# Altium PCB test.PcbDoc
Units mil, origin at the board's own origin, x right, y up, seen from the top; angles counter-clockwise.
Board outline 5150 x 4000 mil, 4 copper layers (Top Layer, Ground, Power, Bottom Layer); 86 components, 62 nets, 253 pads, 52 vias.
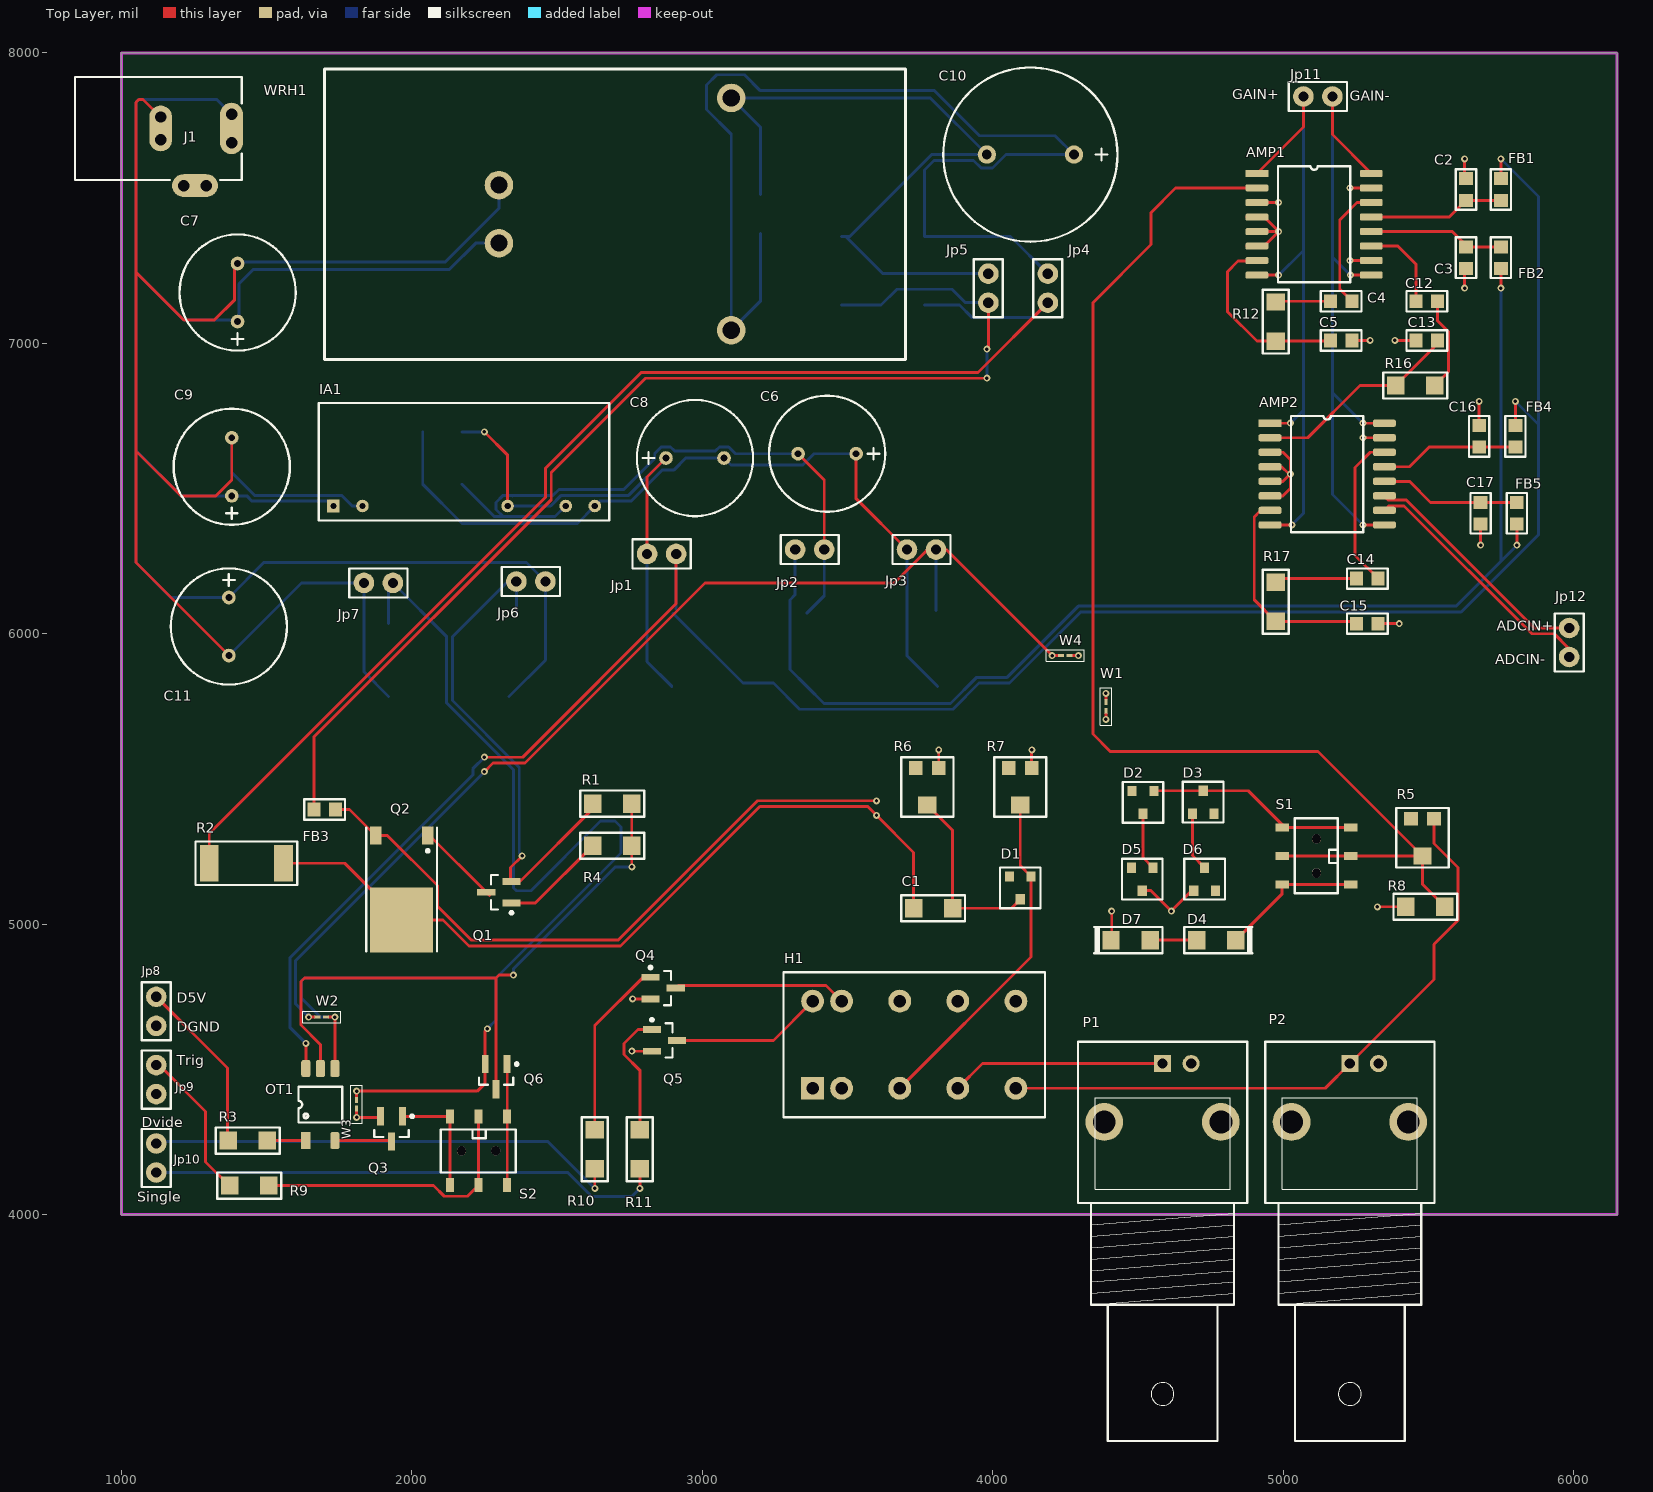
[diagram p0: Top Layer view]
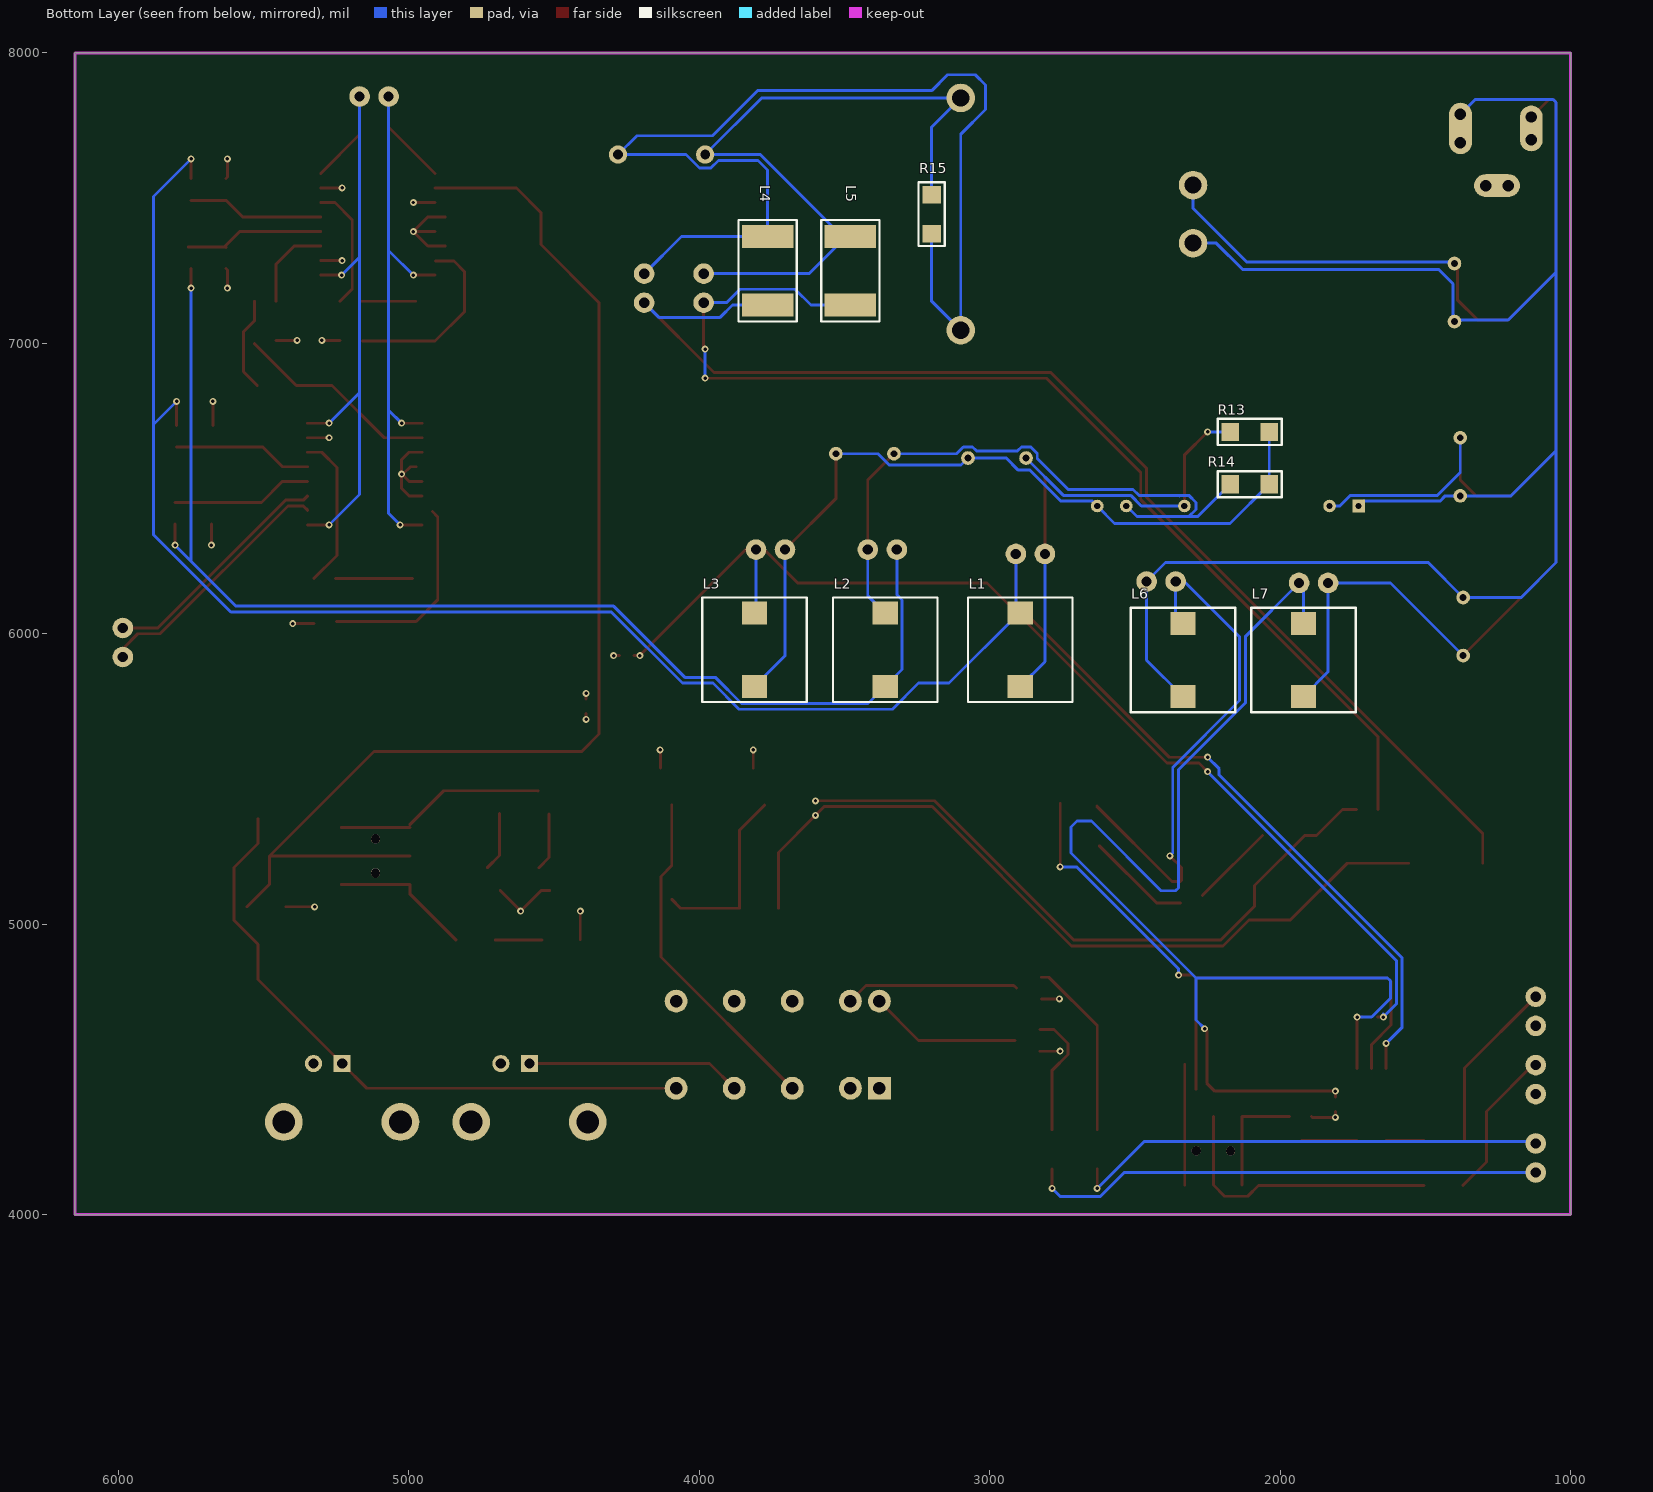
[diagram p1: Bottom Layer view, seen from below]
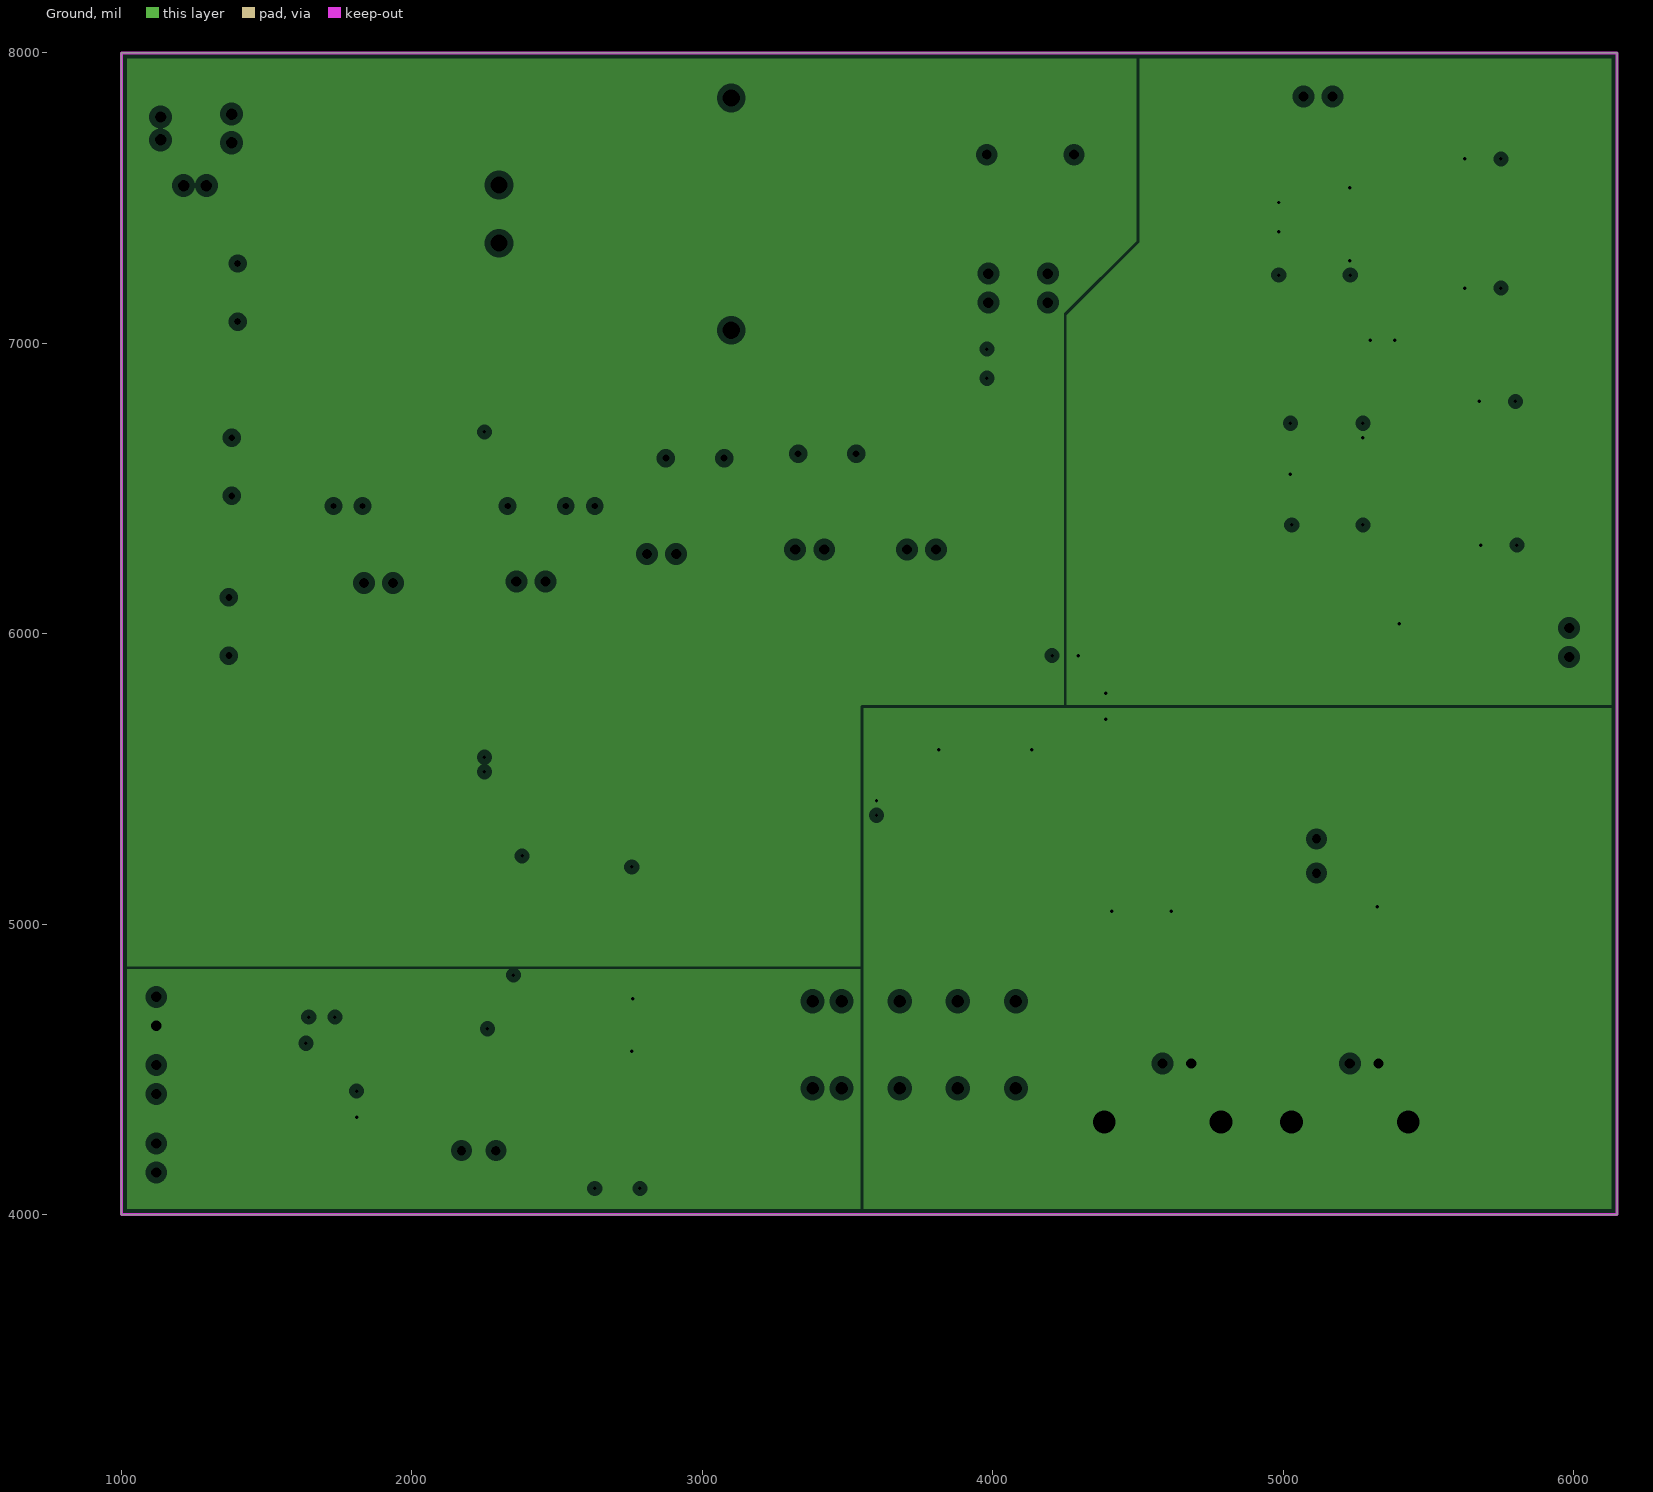
[diagram p2: Ground, clearances drawn from the general rule]
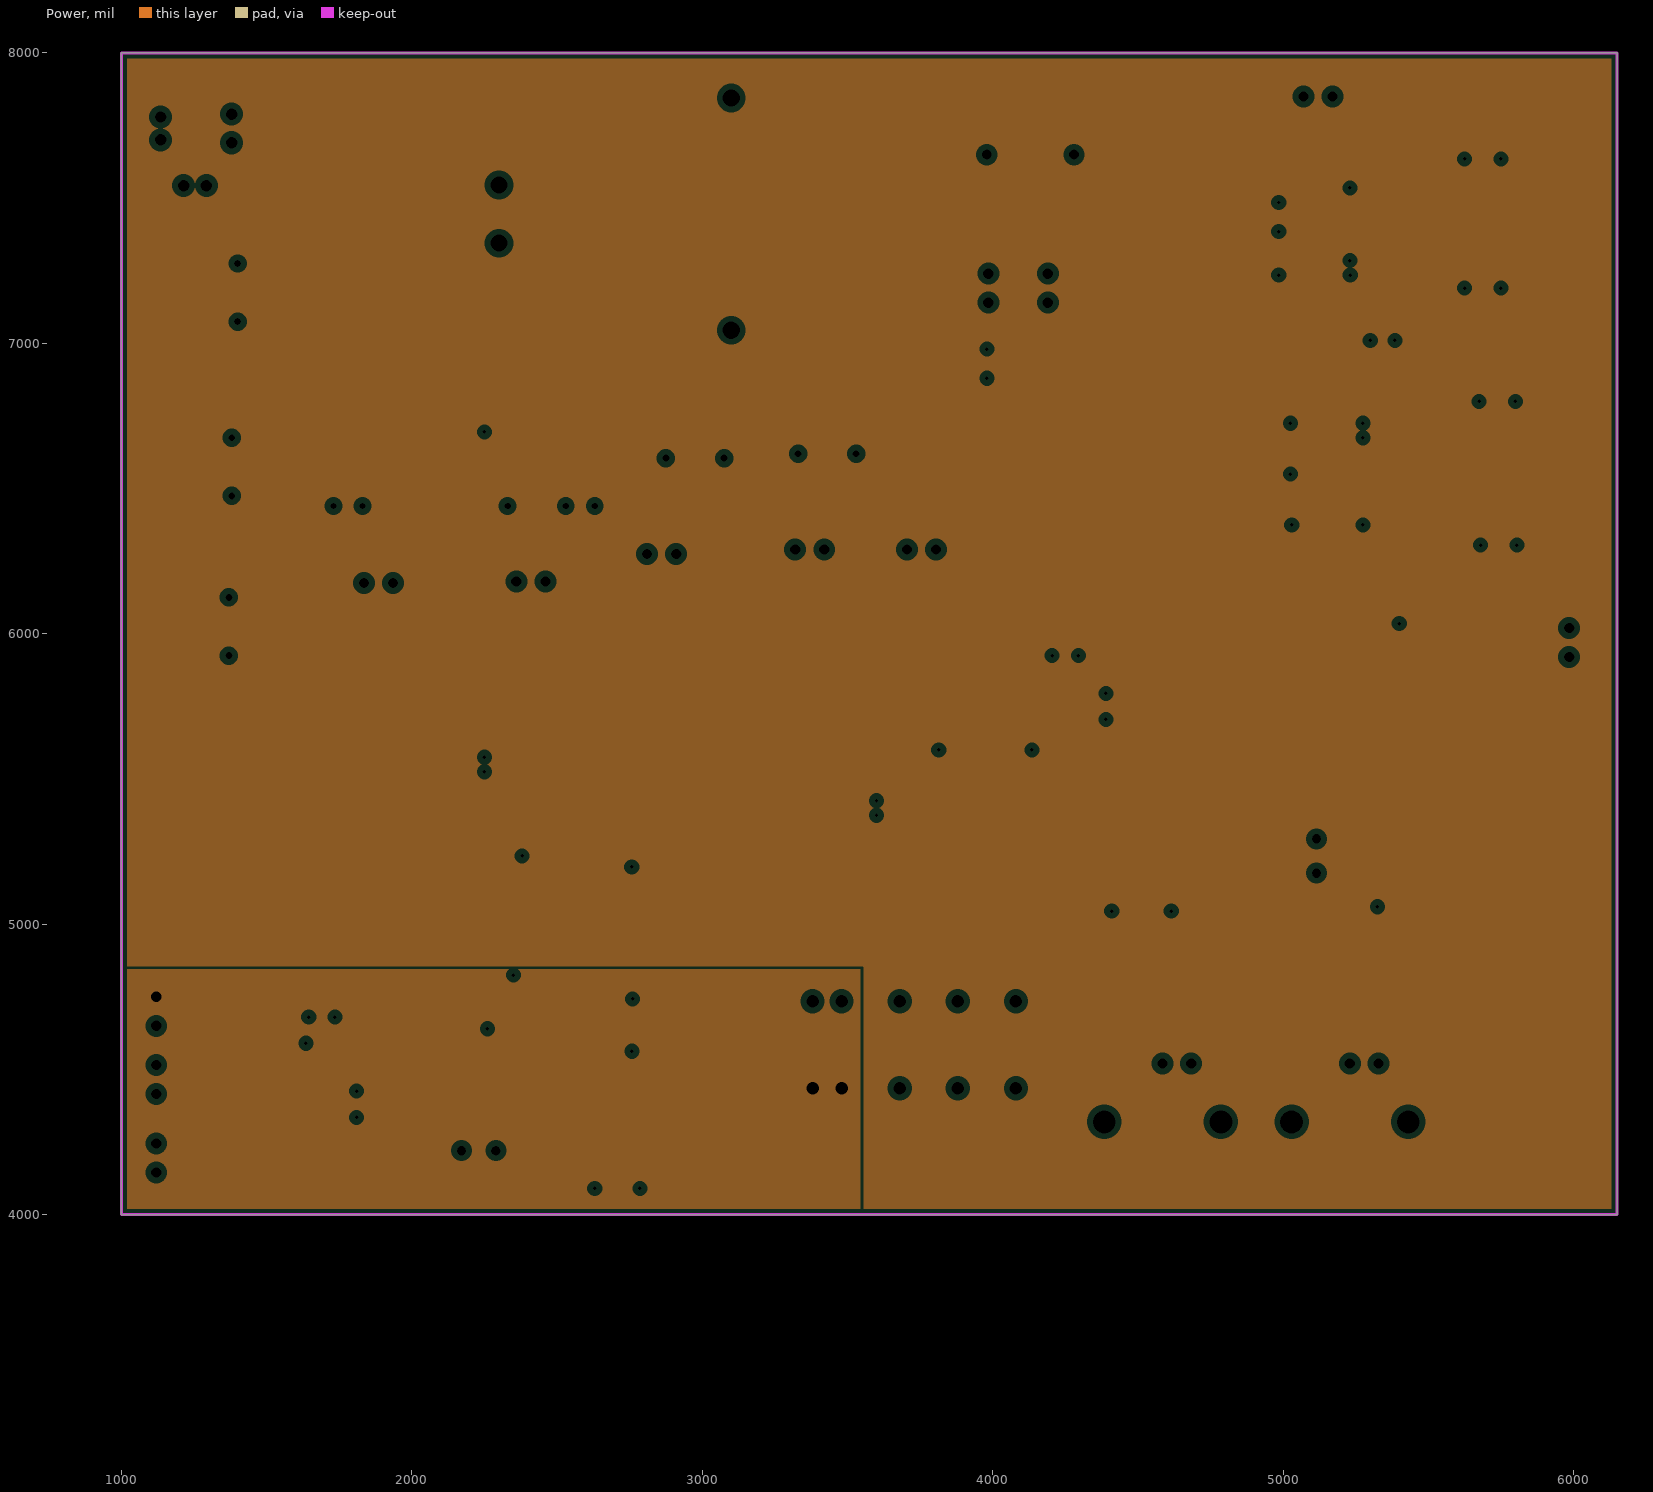
[diagram p3: Power, clearances drawn from the general rule]

## Layer stack, top to bottom
Top Layer: signal copper 1.4
Dielectric: core 12.6, FR-4, Dk 4.8
Ground: plane copper 1.4, net (Multiple Nets)
Dielectric: prepreg 12.6, FR-4, Dk 4.8
Power: plane copper 1.4, net D5V
Dielectric: core 12.6, FR-4, Dk 4.8
Bottom Layer: signal copper 1.4

## Board outline
1000,4000 6150,4000 6150,8000 1000,8000

## Design rules (kind name [scope] priority, off if disabled: settings)
Clearance [All] p1: gap=10
PlaneClearance [All] p1: clearance=20
PlaneConnect [All] p1: planeconnectstyle=Direct reliefexpansion=20 reliefentries=4 reliefconductorwidth=10 reliefairgap=10
PolygonConnect [All] p1: connectstyle=Relief reliefconductorwidth=10 reliefentries=4 polygonreliefangle="90 Angle"
RoutingCorners [All] p1: cornerstyle=Round minsetback=100 maxsetback=100
RoutingVias [All] p1: holewidth=12 width=24 viastyle="Through Hole" minholewidth=12 minwidth=24 maxholewidth=28 maxwidth=50
SilkToSilkClearance [All] p1: silktosilkclearance=0
SilkscreenOverComponentPads [All] p1: minsilkscreentomaskgap=0
SolderMaskExpansion [All] p1: expansion=4
Width [All] p1: maxlimit=10 minlimit=10 preferedwidth=10
23 further rules are at their usual default settings.

## Classes and differential pairs
component class amplify: AMP1 AMP2 C2 C3 C4 C5 C12 C13 C14 C15 C16 C17 FB1 FB2 FB4 FB5 Jp11 Jp12 R12 R16 R17 W4
component class Power: C6 C7 C8 C9 C10 C11 IA1 J1 Jp1 Jp2 Jp3 Jp4 Jp5 Jp6 Jp7 Jp8 L1 L2 L3 L4 L5 L6 L7 R13 R14 R15 WRH1
component class triger: C1 D1 D2 D3 D4 D5 D6 D7 FB3 H1 Jp9 Jp10 OT1 P1 P2 Q1 Q2 Q3 Q4 Q5 Q6 R1 R2 R3 R4 R5 R6 R7 R8 R9 R10 R11 S1 S2 W1 W2 W3

## Components (designator, comment, footprint, x,y, rotation, side; value= is the part's Value field where it differs from the comment)
AMP1 "AD602" SOP16 4910,7585 r0 top
AMP2 "AD602" SOP16 4955,6725 r0 top
C1 "C1206" 1206 3795,5055 r0 top
C2 "C0805" 0805 5630,7530 r90 top
C3 "C0805" 0805 5630,7295 r270 top
C4 "C0805" 0805 5200,7145 r0 top
C5 "C0805" 0805 5200,7010 r180 top
C6 "C-RB.2/.4" RB.2/.4 3330,6620 r0 top
C7 "C-RB.2/.4" RB.2/.4 1400,7275 r270 top
C8 "C-RB.2/.4" RB.2/.4 3075,6605 r180 top
C9 "C-RB.2/.4" RB.2/.4 1380,6675 r270 top
C10 "C-RB.3/.6" RB.3/.6 3980,7650 r0 top
C11 "C-RB.2/.4" RB.2/.4 1370,5925 r90 top
C12 "C0805" 0805 5495,7145 r180 top
C13 "C0805" 0805 5495,7010 r0 top
C14 "C0805" 0805 5290,6190 r0 top
C15 "C0805" 0805 5290,6035 r180 top
C16 "C0805" 0805 5675,6680 r90 top
C17 "C0805" 0805 5680,6415 r270 top
D1 "SMMBD914LT3G" SMMBD914LT3G 4095,5125 r270 top
D2 "SMMBD914LT3G" SMMBD914LT3G 4517.6,5419.37 r270 top
D3 "SMMBD914LT3G" SMMBD914LT3G 4725,5420 r90 top
D4 "ZMM2V4" DIODE1206 4770,4945 r0 top
D5 "SMMBD914LT3G" SMMBD914LT3G 4515,5155 r270 top
D6 "SMMBD914LT3G" SMMBD914LT3G 4730,5155 r90 top
D7 "ZMM2V4" DIODE1206 4475,4945 r180 top
FB1 "FB0805" 0805 5750,7530 r90 top
FB2 "FB0805" 0805 5750,7295 r90 top
FB3 "FB0805" 0805 1700,5395 r180 top
FB4 "FB0805" 0805 5800,6680 r90 top
FB5 "FB0805" 0805 5805,6415 r90 top
H1 "HDF2-L2" RELAY-HFD2-L2 3380,4435 r90 top
IA1 "IA1205S" IA1205S 1730,6440 r90 top
J1 "PWR2.5" KLD-0202 840,7740 r0 top
Jp1 "Jumper" JUMPER 2810,6275 r0 top
Jp2 "Jumper" JUMPER 3420,6290 r180 top
Jp3 "Jumper" JUMPER 3705,6290 r0 top
Jp4 "Jumper" JUMPER 4190,7240 r270 top
Jp5 "Jumper" JUMPER 3985,7240 r270 top
Jp6 "Jumper" JUMPER 2460,6180 r180 top
Jp7 "Jumper" JUMPER 1835,6175 r0 top
Jp8 "Jumper" JUMPER 1120,4650 r90 top
Jp9 "Jumper" JUMPER 1120,4415 r90 top
Jp10 "Jumper" JUMPER 1120,4145 r90 top
Jp11 "Jumper" JUMPER 5170,7850 r180 top
Jp12 "Jumper" JUMPER 5985,5920 r90 top
L1 "L-CHIP774" INDUCTOR070704 2895,5945 r90 bottom
L2 "L-CHIP774" INDUCTOR070704 3360,5945 r270 bottom
L3 "L-CHIP774" INDUCTOR070704 3810,5945 r90 bottom
L4 "NL565050T-103J" NL565050T 3765,7250 r270 bottom
L5 "NL565050T-103J" NL565050T 3480,7250 r270 bottom
L6 "L-CHIP774" INDUCTOR070704 2335,5910 r90 bottom
L7 "L-CHIP774" INDUCTOR070704 1920,5910 r90 bottom
OT1 "PC410L" SOP5 1635,4255 r90 top
P1 "BNC" "BNC_RA CON" 4585,4520 r90 top
P2 "BNC" "BNC_RA CON" 5230,4520 r90 top
Q1 "MMBT3906" SOT23_M 2300,5110 r180 top
Q2 "MTD6N10E" 369A-13 1965,5160 r180 top
Q3 "MMBT3904" SOT23_M 1930,4295 r270 top
Q4 "MMBT3904" SOT23_M 2865,4780 r0 top
Q5 "MMBT3904" SOT23_M 2870,4600 r0 top
Q6 "MMBT3904" SOT23_M 2290,4475 r270 top
R1 "R1206" 1206 2690,5415 r180 top
R2 "R2512" 2512 1430,5210 r180 top
R3 "R1206" 1206 1435,4255 r0 top
R4 "R1206" 1206 2690,5270 r180 top
R5 "ResAdj" "Adjust Resistor" 5480,5300 r180 top
R6 "ResAdj" "Adjust Resistor" 3775,5475 r180 top
R7 "ResAdj" "Adjust Resistor" 4095,5475 r180 top
R8 "R1206" 1206 5490,5060 r0 top
R9 "R1206" 1206 1440,4100 r0 top
R10 "R1206" 1206 2630,4225 r90 top
R11 "R1206" 1206 2785,4225 r90 top
R12 "R1206" 1206 4975,7075 r90 top
R13 "R1206" 1206 2105,6695 r0 bottom
R14 "R1206" 1206 2105,6515 r0 bottom
R15 "R1206" 1206 3200,7445 r270 bottom
R16 "R1206" 1206 5455,6855 r0 top
R17 "R1206" 1206 4975,6110 r90 top
S1 "Switch" MSS-22C02#1 5115,5235 r180 top
S2 "Switch" MSS-22C02#2 2230,4220 r270 top
W1 "Wire" WIRE#1 4390,5750 r90 top
W2 "Wire" WIRE#1 1690,4680 r180 top
W3 "Wire" WIRE#2 1810,4380 r90 top
W4 "Wire" WIRE#1 4250,5925 r180 top
WRH1 "WRH12400S" WRH12400S 2700,7445 r0 top

## Footprints (in the part's own frame and the unit in brackets; to place one, negate y for a bottom-side part, rotate by r counter-clockwise, add the part's x,y. Pads: shape width x height; smd on the part's side, far side on the other; paste and mask are expansions set on the pad)
369A-13 [mm] "D-PAK/TO-252-AA; 3 Leads (1 Cropped); Body 10.3 (inc. leads) x 6.7 mm (LxW max)"
  rect 1x1.6 smd: 1(-2.285,-3.7) 3(2.285,-3.7)
  rect 5.5x5.7 smd: 4(0,3.7)
  silkscreen extent -3.08,-4.4 3.08,6.45
0805 [mm]
  rect 1.14x1.2 smd: 1(-0.95,0) 2(0.95,0)
  silkscreen extent -1.78,-0.89 1.78,0.89
1206 [mm]
  rect 1.52x1.6 smd: 1(-1.71,0) 2(1.71,0)
  silkscreen extent -2.79,-1.14 2.79,1.14
2512 [mm]
  rect 1.65x3.2 smd: 1(-3.24,0) 2(3.24,0)
  silkscreen extent -4.44,-1.91 4.44,1.91
"Adjust Resistor" [mm] "3 * 3"
  rect 1.2x1.2 smd: a(-1,-1.6) c(1,-1.6)
  rect 1.6x1.5 smd: b(0,1.65)
  silkscreen extent -2.29,-2.54 2.29,2.67
"BNC_RA CON" [mm] "Connector; BNC Elbow"
  rect 1.5x1.5 hole 0.9: 1(0,0)
  round 3.3 hole 2: 2(-5.1,-5.1) 2(-5.1,5.1)
  round 1.5 hole 0.9: 2(0,-2.5)
  silkscreen extent -33,-7.4 1.9,7.4
DIODE1206 [mm]
  rect 1.52x1.6 smd: 1(-1.71,0) 2(1.71,0)
  silkscreen extent -2.79,-1.14 3.17,1.14
IA1205S [mm]
  rect 1.1x1.1 hole 0.55: 1(0,0)
  round 1.1 hole 0.55: 2(0,-2.54) 7(0,-15.24) 9(0,-20.32) 10(0,-22.86)
  silkscreen extent -1.27,-24.13 9.02,1.27
INDUCTOR070704 [mm]
  rect 2x2.2 smd: 1(-3.2,0) 2(3.2,0)
  silkscreen extent -4.57,-4.57 4.57,4.57
JUMPER [mm]
  round 1.8 hole 0.9: 1(0,0) 2(2.54,0)
  silkscreen extent -1.27,-1.27 3.81,1.27
KLD-0202 [mm] "DC Power Jack, 2.5mm, KLD Series, PCB Mount"
  oval 2x4.5 all layers, no hole: 1(13.7,0)
  round 1.5 hole 1: 1A(13.7,-1.25) 1B(13.7,1.25) 2A(7.5,-1) 2B(7.5,1) 3A(9.5,-5) 3B(11.5,-5)
  oval 2x4 all layers, no hole: 2(7.5,0)
  oval 4x2 all layers, no hole: 3(10.5,-5)
  silkscreen extent 0,-4.5 14.6,4.5
MSS-22C02#1 [mm]
  rect 1.2x0.7 smd: a(-3,0) a(3,0) b(-3,2.5) b(3,2.5) c(-3,-2.5) c(3,-2.5)
  round 0.82 hole 0.82: ""(0,1.5) ""(0,-1.5)
  Top Layer lines w0.254: 3,2.5 0,2.5 -3,2.5 ; 3,0 -3,0 ; 3,-2.5 -3,-2.5
  silkscreen extent -1.86,-3.3 1.91,3.26
MSS-22C02#2 [mm]
  rect 1.2x0.7 smd: a(-3,0) a(3,0) b(-3,2.5) b(3,2.5) c(-3,-2.5) c(3,-2.5)
  round 0.82 hole 0.82: ""(0,1.5) ""(0,-1.5)
  Top Layer lines w0.254: 3,-2.5 -3,-2.5 ; 3,0 -3,0 ; 3,2.5 -3,2.5
  silkscreen extent -1.86,-3.3 1.91,3.26
NL565050T [mm]
  rect 2x4.5 smd: 1(-3,0) 2(3,0)
  silkscreen extent -4.45,-2.54 4.45,2.54
RB.2/.4 [mm]
  round 1.2 hole 0.6: 1(0,0) 2(5.08,0)
  silkscreen extent -2.54,-5.08 7.62,5.08
RB.3/.6 [mm]
  round 1.6 hole 0.85: 1(0,0) 2(7.62,0)
  silkscreen extent -3.81,-7.62 11.43,7.62
RELAY-HFD2-L2 [mm]
  rect 2x2 hole 1.1: 1(0,0)
  round 2 hole 1.1: 2(0,-2.54) 4(0,-7.62) 6(0,-12.7) 8(0,-17.78) 9(7.62,-17.78) 11(7.62,-12.7) 13(7.62,-7.62) 15(7.62,-2.54) 16(7.62,0)
  silkscreen extent -2.54,-20.32 10.16,2.54
SMMBD914LT3G [mm]
  rect 0.9x0.8 smd: 1(-1,0.95) 2(-1,-0.95) 3(1,0)
  silkscreen extent -1.78,-1.78 1.78,1.78
SOP5 [mm]
  rect 1.5x0.8 smd: 1(0,0)
  rrect50% 1.5x0.8 smd: 3(0,-2.54) 4(6.3,-2.54) 5(6.3,-1.27) 6(6.3,0)
  silkscreen extent 1.59,-3.17 4.72,0.64
SOP16 [mm]
  rect 2x0.63 smd: 1(0,0)
  rrect50% 2x0.63 smd: 2(0,-1.27) 3(0,-2.54) 4(0,-3.81) 5(0,-5.08) 6(0,-6.35) 7(0,-7.62) 8(0,-8.89) 9(10,-8.89) 10(10,-7.62) 11(10,-6.35) 12(10,-5.08) 13(10,-3.81) 14(10,-2.54) 15(10,-1.27) 16(10,0)
  silkscreen extent 1.83,-9.53 8.16,0.64
SOT23_M [mm] "SOT23, 3-Leads, Body 2.9x1.3mm, Pitch 0.95mm, Lead Span 2.3mm, IPC Low Density"
  rect 1.6x0.6 smd: 1(-1.1,0.95) 2(-1.1,-0.95) 3(1.1,0)
  silkscreen extent -1.23,-1.5 0.7,1.92, body extent -0.7,-1.5 0.7,1.5, height 1.1
WIRE#1 [mil]
  rect 20x10 smd mask+5: 1(-15,0) 2(15,0)
  Top Layer lines w10: -45,0 -25,0 ; 25,0 45,0
  silkscreen extent -65,-20 65,20
WIRE#2 [mil]
  rect 20x10 smd mask+5: 1(-15,0) 2(15,0)
  Top Layer lines w10: -45,0 -41.69,0 -25,0 ; 25,0 45,0
  silkscreen extent -65,-20 65,20
WRH12400S [mm]
  round 2.5 hole 1.5: 1(-10.16,-2.54) 2(-10.16,2.54) 3(10.16,-10.16) 5(10.16,10.16)
  silkscreen extent -25.4,-12.7 25.4,12.7

## Part data
C1: "Capacitor, 1206"
C2 C3 C4 C5 C12 C13 C14 C15 C16 C17: "Capacitor, 0805"
C6 C7 C8 C9 C10 C11: "Capacitor"
D1 D2 D3 D5 D6: "Switching Diode"
D4 D7: "Voltage Stabilizing Diode, 2.4V"
FB1 FB2 FB3 FB4 FB5: "Chip Bead, 0805"
H1: library part Relay-HDF2-L2, "Relay, HDF2-XX-XX-L2-XX"
IA1: "IA1205S,12V to +5V,-5V"
J1: "Low Voltage Power Supply Connector"
L1 L2 L3 L6 L7: library part Inductor070704, "Chip Inductor, 7*7*4"
L4 L5: "NL565050T, 10mH, 150 ohm"
P1 P2: "BNC Elbow Connector"
Q1: "PNP Switching Transistor"
Q2: "TMOS E-FET Power Field Effect Transistor DPAK for Surface Mount"
Q3 Q4 Q5 Q6: "NPN Switching Transistor"
R1 R3 R4 R8 R9 R10 R11 R12 R13 R14 R15 R16 R17: "Resistor, 1206, 1/4W"
R2: "Resistor, 2512, 1W"
R5 R6 R7: "Adjustable Resistor"
S1 S2: library part MSS-22C02, "Duble Switch"
WRH1: "WRH12400S,12V-400V"

## Via types
v1: diameter 24, hole 12, Top Layer to Bottom Layer, 52 vias

## Nets (pads, with @x,y where several pads share a name; then routed paths per layer and width w, separated by ;. In a path a pad name is that pad's centre, name@x,y a point inside that pad or via, vN(x,y) a via of type N, cw(c..) or ccw(c..) an arc to the next point about the centre after c; other vN are vias at no path point)
12V: Jp6.2 L6.2 Q1.2 R1.2 | length 1768.3
  Top Layer w10: Q1.2@2340,5150.71 2340,5195 v1(2380,5235) ; Q1.2 2372.4,5147.4 R1.2@2631.34,5406.34
  Bottom Layer w10: L6.2@2360,6060.98 Jp6.2 2330,6180 2140,5990 2140,5770 2370,5540 2370,5245 v1(2380,5235)
12VREF: Jp7.2 L7.2 OT1.4 Q6.2 W2.1 W3.2 | length 4451.6
  Top Layer w10: OT1.4 v1(1735,4680) ; v1(1810,4425) 2225,4425 2252.6,4452.6 Q6.2 v1@2252.6,4632.6 ; Jp7.2 Jp7.2@1965,6175
  Bottom Layer w10: v1(1735,4680) 1685,4680 1620,4745 1620,4805 1630,4815 2290,4815 ; L7.2 1920,6145 1935,6160 Jp7.2 2120,5990 2120,5761.72 2350,5531.72 2350,5125 2360,5115 2410,5115 2650,5355 2700,5355 2720,5335 2720,5245 2290,4815 ; v1(2260,4640) 2290,4670 2290,4815
400V: Jp4.2 L4.2 R2.2 | length 4269
  Top Layer w10: R2.2 1302.44,5312.44 2460,6470 2460,6570 2790,6900 3950,6900 Jp4.2
  Bottom Layer w10: L4.2 3885.88,7131.89 3928.2,7089.57 4139.57,7089.57 Jp4.2
400VREF: FB3.2 Jp5.2 L5.2 | length 3924.9
  Top Layer w10: FB3.2 1662.6,5644.31 2480,6461.72 2480,6555 2805,6880 v1(3980,6880) ; v1@3985,6985 Jp5.2
  Bottom Layer w10: L5.2 3615.83,7131.89 3670.2,7186.26 3859.8,7186.26 3906.06,7140 Jp5.2 ; v1(3980,6880) v1@3980,6970
  other v1: 3980,6980
+5V: FB1.2 FB4.2 Jp1.2 L1.2 OT1.6 | length 7602.2
  Top Layer w10: OT1.6 v1(1635,4590) ; v1(2250,5575) 2381.72,5575 2910,6103.28 Jp1.2 Jp1.2@2925,6275 ; FB1.2 v1(5750,7635) ; FB4.2 v1(5800,6800)
  Bottom Layer w10: v1(1635,4590) 1580,4645 1580,4883.28 2210,5513.28 2210,5535 v1(2250,5575) ; L1.2@2900,6070 3140,5830 3245.13,5830 3335.13,5740 3863.16,5740 3953.16,5830 4058.28,5830 4303.28,6075 5613.18,6075 5879.14,6340.96 5879.14,6720.86 ; L1.2@2910,6085 Jp1.2 ; v1(5750,7635) 5879.14,7505.86 5879.14,6720.86 ; v1(5800,6800) 5879.14,6720.86
+-5VREF: Jp3.2 L3.2 W2.2 W4.2 | length 3777.7
  Top Layer w10: v1(2250,5525) 2280,5555 2390,5555 3010,6175 3661.32,6175 3776.32,6290 Jp3.2 3840,6290 v1(4205,5925)
  Bottom Layer w10: v1@1645,4691.72 v1(1645,4680) 1600,4725 1600,4875 v1(2250,5525) ; L3.2@3805,6080 Jp3.2
-5V: FB2.1 FB5.1 Jp2.2 L2.2 | length 5272.3
  Top Layer w10: v1(5750,7190) FB2.1 ; v1(5805,6305) FB5.1
  Bottom Layer w10: Jp2.2 3320,6134.87 3301.69,6116.57 3301.69,5877.32 L2.2 3419.02,5760 3854.87,5760 3944.87,5850 4050,5850 4295,6095 5595,6095 ; 4820,6095 5595,6095 ; v1(5750,7190) 5750,6250 5595,6095 ; v1(5805,6305) 5595,6095
ADCIN+: AMP2.11 Jp12.2 | length 824.8
  Top Layer w10: AMP2.11 5363.7,6460 5425,6460 5865,6020 Jp12.2
ADCIN-: AMP2.10 Jp12.1 | length 874.7
  Top Layer w10: AMP2.10 5363.7,6440 5416.72,6440 5856.72,6000 5933.68,6000 5985,5948.68 Jp12.1
AGND: D5.3 D6.1 D7.2 FB3.1 P1.2 P2.2 Q2.3 R6.a R7.a R8.1 W1.1 | length 2837.9
  Top Layer w10: FB3.1 1785.71,5395 Q2.3 1915.35,5305.67 2088.27,5132.75 2088.27,5061.73 2205,4945 2710,4945 3190,5425 v1(3600,5425) ; R6.a v1(3814.37,5600) ; R7.a v1@4134.37,5600 ; D7.2@4410,4947.32 v1(4410,5045) ; D5.3 4544.37,5115.63 v1(4615,5045) D6.1@4685.63,5115.63 ; v1(5325,5060) R8.1
  other v1: 4135,5600 4390,5705
D5V: H1.1 H1.2 Jp8.2 R3.1 | length 596.5
  Top Layer w10: Jp8.2 1365,4505 R3.1@1365,4255
DGND: Jp8.1 Q3.2 Q4.2 Q5.2 W3.1 | length 215.8
  Top Layer w10: v1(1810,4335) 1889.29,4335 Q3.2 ; v1(2757.6,4562.6) Q5.2 ; v1@2760,4740 2762.6,4742.6 Q4.2
  other v1: 2760,4742.6
DIVIDE: Jp10.2 R10.1 | length 1647
  Top Layer w10: v1(2630,4090) R10.1
  Bottom Layer w10: Jp10.2 1126.14,4251.14 2468.86,4251.14 v1(2630,4090)
GAINCTRL: AMP1.1 AMP1.8 AMP2.1 AMP2.8 Jp11.2 | length 2219.6
  Top Layer w10: AMP1.8 v1(4985,7235) ; AMP1.1 5070,7745 Jp11.2 ; AMP2.8 v1(5030,6375) ; AMP2.1 v1(5025,6725)
  Bottom Layer w10: v1(4985,7235) 5065,7315 ; v1(5025,6725) 5070,6770 ; v1(5030,6375) 5070,6415 5070,6770 ; Jp11.2 5070,6770
NetAMP1_7: AMP1.7 C5.2 R12.1 | length 646.6
  Top Layer w10: AMP1.7@4908.18,7283.18 4845,7283.18 4808,7246.18 4808,7109.6 4909.92,7007.68 R12.1 C5.2@5160.27,7007.68
NetAMP1_9: AMP1.9 AMP1.16 AMP2.9 AMP2.16 Jp11.1 | length 2290.4
  Top Layer w10: Jp11.1 5170,7718.7 AMP1.16 ; v1@5235,7235 AMP1.9 ; v1(5275,6375) AMP2.9 ; v1(5275,6725) AMP2.16
  Bottom Layer w10: Jp11.1 5170,7296.46 ; v1(5231.46,7235) 5170,7296.46 ; v1(5275,6375) 5170,6480 5170,6830 ; v1(5275,6725) 5170,6830 ; 5170,6830 5170,7296.46
NetAMP1_11: AMP1.11 C12.2 | length 307.2
  Top Layer w10: AMP1.11 5395,7335 5457.6,7272.4 C12.2
NetAMP1_12: AMP1.12 C3.1 FB2.2 | length 480.5
  Top Layer w10: AMP1.12 5582.4,7385 5635,7332.4 FB2.2 FB2.2@5760,7332.4 ; C3.1@5630,7330 C3.1
NetAMP1_13: AMP1.13 C2.1 FB1.1 | length 470.2
  Top Layer w10: AMP1.13 5572.4,7435 C2.1 FB1.1
NetAMP1_14: AMP1.14 C4.2 | length 431.1
  Top Layer w10: C4.2 5195,7187.4 5195,7425 5255,7485 AMP1.14
NetAMP2_2: AMP2.2 C13.2 R16.1 | length 711.9
  Top Layer w10: AMP2.2 5085,6675 5265,6855 R16.1 C13.2@5532.4,6999.72
NetAMP2_7: AMP2.7 C15.2 R17.1 | length 691.6
  Top Layer w10: AMP2.7@4919.11,6420.89 4900.63,6402.4 4900.63,6117.05 R17.1 C15.2@5249.92,6042.68
NetAMP2_12: AMP2.12 C17.1 FB5.2 | length 486.4
  Top Layer w10: AMP2.12 5435,6525 5507.6,6452.4 C17.1 FB5.2
NetAMP2_13: AMP2.13 C16.1 FB4.1 | length 491.7
  Top Layer w10: AMP2.13 5435,6575 5502.6,6642.6 5600,6642.6 ; 5587.6,6642.6 C16.1 FB4.1
NetAMP2_14: AMP2.14 C14.2 | length 538.1
  Top Layer w10: C14.2 5248,6269.4 5248,6573 5300,6625 AMP2.14
NetC1_1: C1.1 Q2.4 R2.1 | length 2744.6
  Top Layer w10: R2.1 1769.33,5210 Q2.4 2107.39,5014.33 2196.72,4925 2718.28,4925 3198.28,5405 3570,5405 v1(3600,5375) 3727.68,5247.32 C1.1
NetC1_2: C1.2 D1.3 R6.b | length 636.6
  Top Layer w10: R6.b 3862.32,5322.72 C1.2 4064.37,5055 D1.3
NetC4_1: C4.1 R12.2 | length 184.9
  Top Layer w10: R12.2@4977.68,7145 C4.1
NetC6_1: C6.1 IA1.9 Jp2.1 L2.1 R14.2 | length 2254.2
  Top Layer w10: C6.1 3420,6530 Jp2.1
  Bottom Layer w10: R14.2 2283.98,6403.35 2314.82,6403.35 ; 2346.84,6475 2345.18,6476.65 ; IA1.9@2518.22,6440 IA1.9 2493.35,6403.35 2314.82,6403.35 ; C6.1 3114.62,6620 3091,6643.62 3059,6643.62 3045.38,6630 2904.62,6630 2891,6643.62 2859,6643.62 2836.38,6621 2836.38,6603.03 2730,6496.65 2506.53,6496.65 2486.53,6476.65 2345.18,6476.65 ; L2.1 3420,6130.98 Jp2.1 ; 2314.82,6403.35 2290,6428.16 2290,6451.84 2314.82,6476.65 2345.18,6476.65
NetC6_2: C6.2 C8.1 IA1.10 Jp3.1 L3.1 R13.1 R14.1 | length 2764.2
  Top Layer w10: C6.2 3530,6465 Jp3.1
  Bottom Layer w10: R13.1 R14.1 2172.68,6380 2570,6380 IA1.10 2646.65,6456.65 2754.94,6456.65 2861.64,6563.36 2901.64,6563.36 2943.28,6605 C8.1 3098.62,6581.38 3346,6581.38 3384.62,6620 C6.2 ; Jp3.1 3705,5924.02 L3.1
NetC7_1: C7.1 C9.1 C11.1 IA1.2 J1.2 J1.2A J1.2B Jp7.1 L7.1 WRH1.2 | length 5955
  Top Layer w10: 1057.5,6622.5 1205,6475 1325.38,6475 1380,6529.62 C9.1 ; J1.2B 1074.65,7840 1060,7840 1050,7830 1050,7245 ; C11.1 1050,6245 1050,7245 ; C7.1@1390,7280 1390,7150 1320,7080 1215,7080 1050,7245
  Bottom Layer w10: C11.1 1620,6175 Jp7.1 1835,5869.02 L7.1 ; C9.1@1375,6675 C9.1 1380,6555 1458.35,6476.65 1757.87,6476.65 1794.52,6440 IA1.2 ; C7.1@1390,7280 2115,7280 2300,7465 WRH1.2
NetC7_2: C7.2 C9.2 C11.2 IA1.1 J1.1 J1.1A J1.1B Jp6.1 L6.1 WRH1.1 | length 6186.3
  Top Layer w10: Jp6.1 Jp6.1@2485,6180
  Bottom Layer w10: J1.1B 1328.58,7840 1060,7840 1050,7830 1050,7245 ; C7.2@1390,7090 C7.2@1390,7080 ; IA1.1@1713.35,6456.65 1450.06,6456.65 1431.72,6475 C9.2 1205,6475 1050,6630 ; WRH1.1 2220,7345 2130,7255 1455,7255 1405,7205 1405,7095 C7.2@1390,7080 ; L6.1 2460,5909.02 Jp6.1 2395,6245 1490,6245 C11.2 1170,6125 1050,6245 1050,6630 ; 1050,6630 1050,7245 ; 1050,7245 1215,7080 C7.2@1390,7080
NetC8_2: C8.2 IA1.7 Jp1.1 L1.1 R13.2 | length 1827.3
  Top Layer w10: v1(2250,6695) 2330,6615 IA1.7 ; Jp1.1 2810,6540 C8.2
  Bottom Layer w10: R13.2 v1(2250,6695) ; IA1.7 2478.16,6440 2514.82,6476.65 2746.65,6476.65 C8.2 ; Jp1.1 2810,5904.02 L1.1
NetC10_1: C10.1 Jp5.1 L5.1 R15.1 WRH1.5 | length 2493.6
  Bottom Layer w10: R15.1 3200,7745 WRH1.5 3785,7845 3975,7655 C10.1@3975,7650 ; L5.1 L5.1@3494.05,7368.11 ; C10.1 C10.1@3975,7650 ; Jp5.1 3622.16,7240 L5.1@3494.05,7368.11 ; L5.1@3494.05,7368.11 3508.11,7368.11 3790,7650 C10.1@3975,7650
NetC10_2: C10.2 Jp4.1 L4.1 R15.2 WRH1.3 | length 3913.4
  Bottom Layer w10: R15.2 3200,7145 WRH1.3 3100,7720 3015,7805 3015,7890 3050,7925 3145,7925 3200,7870 3800,7870 3955,7715 4215,7715 C10.2 4045.76,7650 3999.26,7603.5 3960.74,7603.5 3934.24,7630 3798.28,7630 3765,7596.72 L4.1 4061.89,7368.11 Jp4.1
NetC12_1: C12.1 R16.2 | length 325.2
  Top Layer w10: R16.2 5569.84,6902.52 5569.84,7039.84 5532.4,7077.28 C12.1
NetC14_1: C14.1 R17.2 | length 264.9
  Top Layer w10: R17.2@4987.68,6190 C14.1
NetD1_1: D1.1 H1.4 R7.b | length 1177.9
  Top Layer w10: H1.4 4132.4,4887.4 D1.1 4095,5201.77 R7.b
NetD2_1: D2.1 D3.3 S1.c | length 490.6
  Top Layer w10: D2.1 4555.63,5459.37 D3.3 4880,5459.37 S1.c@4996.89,5342.48
NetD2_3: D2.3 D5.1 | length 200
  Top Layer w10: D2.3 4517.6,5229.17 D5.1
NetD3_1: D3.1 D6.3 | length 203.8
  Top Layer w10: D3.1 4687.6,5236.77 D6.3
NetD4_1: D4.1 D7.1 | length 160.4
  Top Layer w10: D7.1 D4.1
NetD4_2: D4.2 S1.b | length 257.7
  Top Layer w10: D4.2 4996.89,5104.57 S1.b@4996.89,5136.57
NetH1_6: H1.6 P1.1 | length 740.2
  Top Layer w10: H1.6 3965,4520 P1.1
NetH1_8: H1.8 P2.1 R5.a | length 2216.7
  Top Layer w10: H1.8 5145,4435 P2.1 5519.37,4809.37 5519.37,4930.63 5602.24,5013.5 5602.24,5195.03 5519.37,5277.91 R5.a
NetH1_15: H1.15 Q4.3 | length 598.1
  Top Layer w10: Q4.3 2917.68,4789.37 3425.63,4789.37 H1.15
NetH1_16: H1.16 Q5.3 | length 522.6
  Top Layer w10: Q5.3 3245,4600 H1.16
NetJ1_3: J1.3 J1.3A J1.3B
NetOT1_1: OT1.1 R3.2 | length 130
  Top Layer w10: R3.2@1505,4255 OT1.1
NetOT1_3: OT1.3 Q3.3 | length 191.7
  Top Layer w10: OT1.3 Q3.3@1926.69,4255
NetOT1_5: OT1.5 Q6.3 R1.1 R4.1 | length 2244.1
  Top Layer w10: OT1.5 1685,4586 1618,4653 1618,4803 1630,4815 2290,4815 ; Q6.3 2290,4815 ; v1(2350,4825) 2300,4825 2290,4815 ; v1(2757.32,5197.32) R4.1 R1.1
  Bottom Layer w10: v1(2350,4825) 2350,4846.72 2700.61,5197.32 v1(2757.32,5197.32)
NetQ1_1: Q1.1 R4.2 | length 361.1
  Top Layer w10: Q1.1 2425.28,5072.6 R4.2
NetQ1_3: Q1.3 Q2.1 | length 291.7
  Top Layer w10: Q2.1@2061.02,5305.67 Q1.3 Q1.3@2267.28,5099.41
NetQ3_1: Q3.1 S2.c | length 164
  Top Layer w10: Q3.1 S2.c@2131.38,4338.31
NetQ4_1: Q4.1 R10.2 | length 619.2
  Top Layer w10: R10.2 2630,4650.78 2796.62,4817.4 Q4.1
NetQ5_1: Q5.1 R11.2 | length 435.7
  Top Layer w10: R11.2 2785,4497.01 2730.6,4551.41 2730.6,4589.6 2778.4,4637.4 Q5.1
NetQ6_1: Q6.1 S2.b | length 179.2
  Top Layer w10: S2.b@2328.43,4338.11 Q6.1@2328.43,4517.28
NetR9_2: R9.2 S2.a | length 756.2
  Top Layer w10: R9.2@1505,4100 2074.85,4100 2111.58,4063.27 2191.38,4063.27 S2.a@2230,4101.89
SIGNALGND: AMP1.3 AMP1.4 AMP1.5 AMP1.6 AMP1.10 AMP1.15 AMP2.3 AMP2.4 AMP2.5 AMP2.6 AMP2.15 C2.2 C3.2 C5.1 C13.1 C15.1 C16.2 C17.2 W1.2 W4.1 | length 1538.3
  Top Layer w10: AMP1.6@4875,7335 AMP1.6 4935,7335 v1(4985,7385) ; AMP1.4@4875,7435 AMP1.4 4935,7435 v1(4985,7385) ; AMP1.5 v1(4985,7385) ; AMP1.3 v1(4985,7485) ; AMP2.6 5000,6475 5025,6500 v1(5025,6550) ; AMP2.5 5000,6525 v1(5025,6550) ; AMP2.3 5000,6625 5025,6600 v1(5025,6550) ; AMP2.4@4975,6575 4995,6575 5020,6550 v1(5025,6550) ; v1(5230,7285) AMP1.10 ; v1(5230,7535) AMP1.15 ; C5.1 v1(5300,7010) ; v1(5275,6675) AMP2.15 ; C15.1 v1@5395,6035 ; v1(5385,7010) C13.1 ; v1(5625,7190) 5625,7252.6 C3.2 ; C2.2 5625,7572.4 v1(5625,7635) v1@5630,7630 ; C16.2 v1(5675,6800) ; v1(5680,6305) C17.2
  other v1: 4390,5795 4295,5925 5400,6035
SINGLE: Jp10.1 R11.1 | length 1777.8
  Top Layer w10: v1(2785,4090) R11.1
  Bottom Layer w10: Jp10.1 2536.82,4145 2618.82,4063 2758,4063 v1(2785,4090)
TRIG: Jp9.2 R9.1 | length 528.6
  Top Layer w10: Jp9.2@1120,4525 1290,4355 1290,4181.26 1370,4101.26 R9.1@1370,4100
WAVESIGNAL: AMP1.2 R5.b R8.2 S1.a | length 4040.9
  Top Layer w10: AMP1.2 4630,7535 4545,7450 4545,7340 4345,7140 4345,5655 4405,5595 5120.04,5595 R5.b ; S1.a@5233.15,5235.04 R5.b ; R8.2 5480,5137.32 R5.b
pads on no net: D1.2 D2.2 D3.2 D5.2 D6.2 H1.9 H1.11 H1.13 Jp9.1 R5.c R6.c R7.c S1. S2.

## Polygon pours and split planes (outlines as drawn)
SIGNALGND on Ground (split plane): 6129.9,5755.1 4255.1,5755.1 4255.1,7097.89 4503.6,7346.4 4504.71,7348.05 4505.1,7350 4505.1,7385 4505.1,7979.9 6129.9,7979.9
AGND on Ground (split plane): 6129.9,4020.1 3555.1,4020.1 3555.1,4850 3555.1,5744.9 6129.9,5744.9
no net on Ground (split plane): 4494.9,7385 4494.9,7352.11 4246.4,7103.6 4245.29,7101.95 4244.9,7100 4244.9,5755.1 3550,5755.1 3548.05,5754.71 3546.4,5753.6 3545.29,5751.95 3544.9,5750 3544.9,4855.1 1020.1,4855.1 1020.1,7979.9 4494.9,7979.9
DGND on Ground (split plane): 3544.9,4020.1 1020.1,4020.1 1020.1,4844.9 3544.9,4844.9
D5V on Power (split plane): 3544.9,4020.1 1020.1,4020.1 1020.1,4844.9 3544.9,4844.9
D5V on Power (split plane): 6129.9,4020.1 3555.1,4020.1 3555.1,4850 3554.71,4851.95 3553.6,4853.6 3551.95,4854.71 3550,4855.1 1020.1,4855.1 1020.1,7979.9 6129.9,7979.9

## Keep-outs
Keep-Out Layer:
  the board outline again, w10

## Other copper
Ground (plane layer: these items are gaps in the copper):
  lines w10: 1000,4850 3550,4850 ; 3550,4000 3550,4850 ; 4250,5750 4250,7100 4500,7350 4500,7385 4500,8000 ; 6150,4000 6150,5750 3550,5750 3550,4850
Power (plane layer: these items are gaps in the copper):
  lines w10: 1000,4850 3550,4850 3550,4000

## Silkscreen, mask and mechanical layers (free items; w line width, h text height)
Top Overlay:
  text "GAIN+" at 4825,7840 h35
  text "GAIN-" at 5230,7835 h35
  text "ADCIN+" at 5735,6010 h35
  text "ADCIN-" at 5730,5895 h35
  text "D5V" at 1190,4730 h35
  text "DGND" at 1190,4630 h35
  text "Trig" at 1190,4515 h35
  text "Dvide" at 1070,4300 h35
  text "Single" at 1055,4045 h35

## Text inside footprints (layer, text, board x,y; h text height)
J1: Mechanical 1 "Alert PCB fab to slot details" at 851.26,7978.81 h11.81; Mechanical 1 "Assign keep-out area to slot" at 851.26,7998.5 h11.81; Mechanical 1 "Mech 1 - Slot cut-out" at 851.26,7959.13 h11.81; Mechanical 1 "Mech 2 - Clearance, move to internal plane if present" at 851.26,7939.44 h11.81